# EAGLE board Main-DESKTOP-GF130J3 (EAGLE 9.4.2)
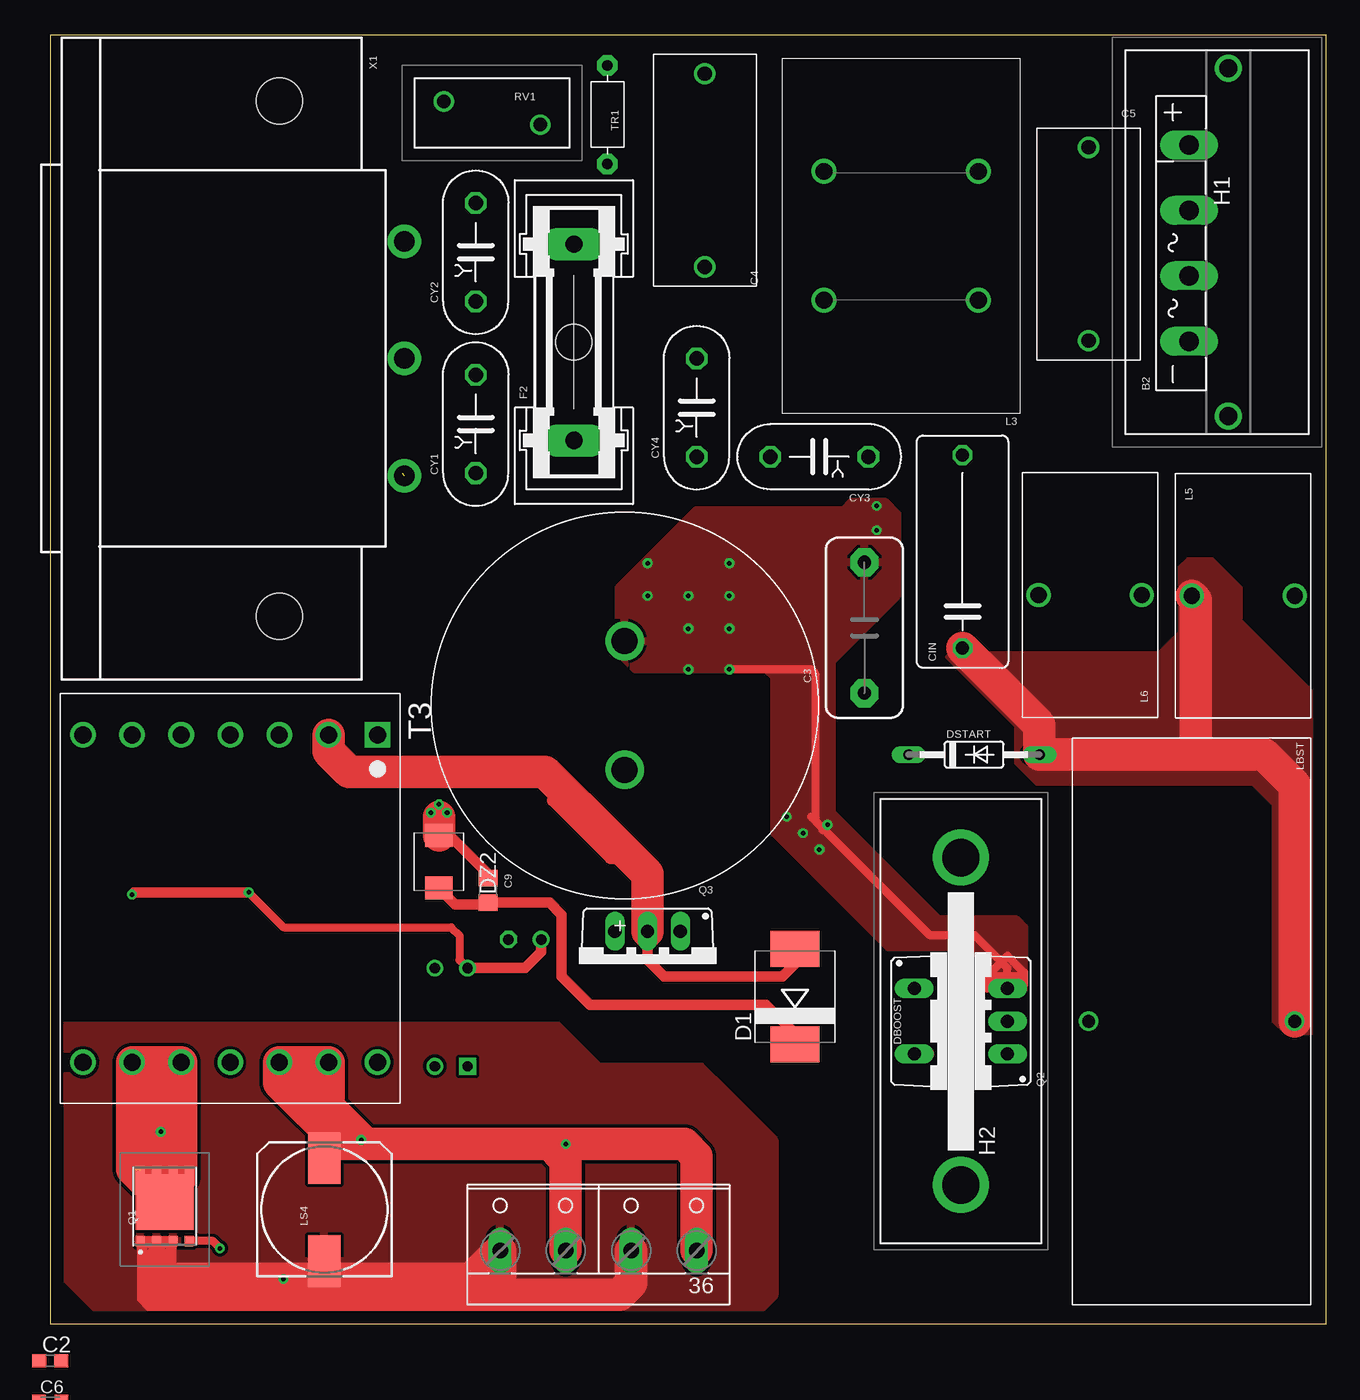
[diagram p0: board, top side]
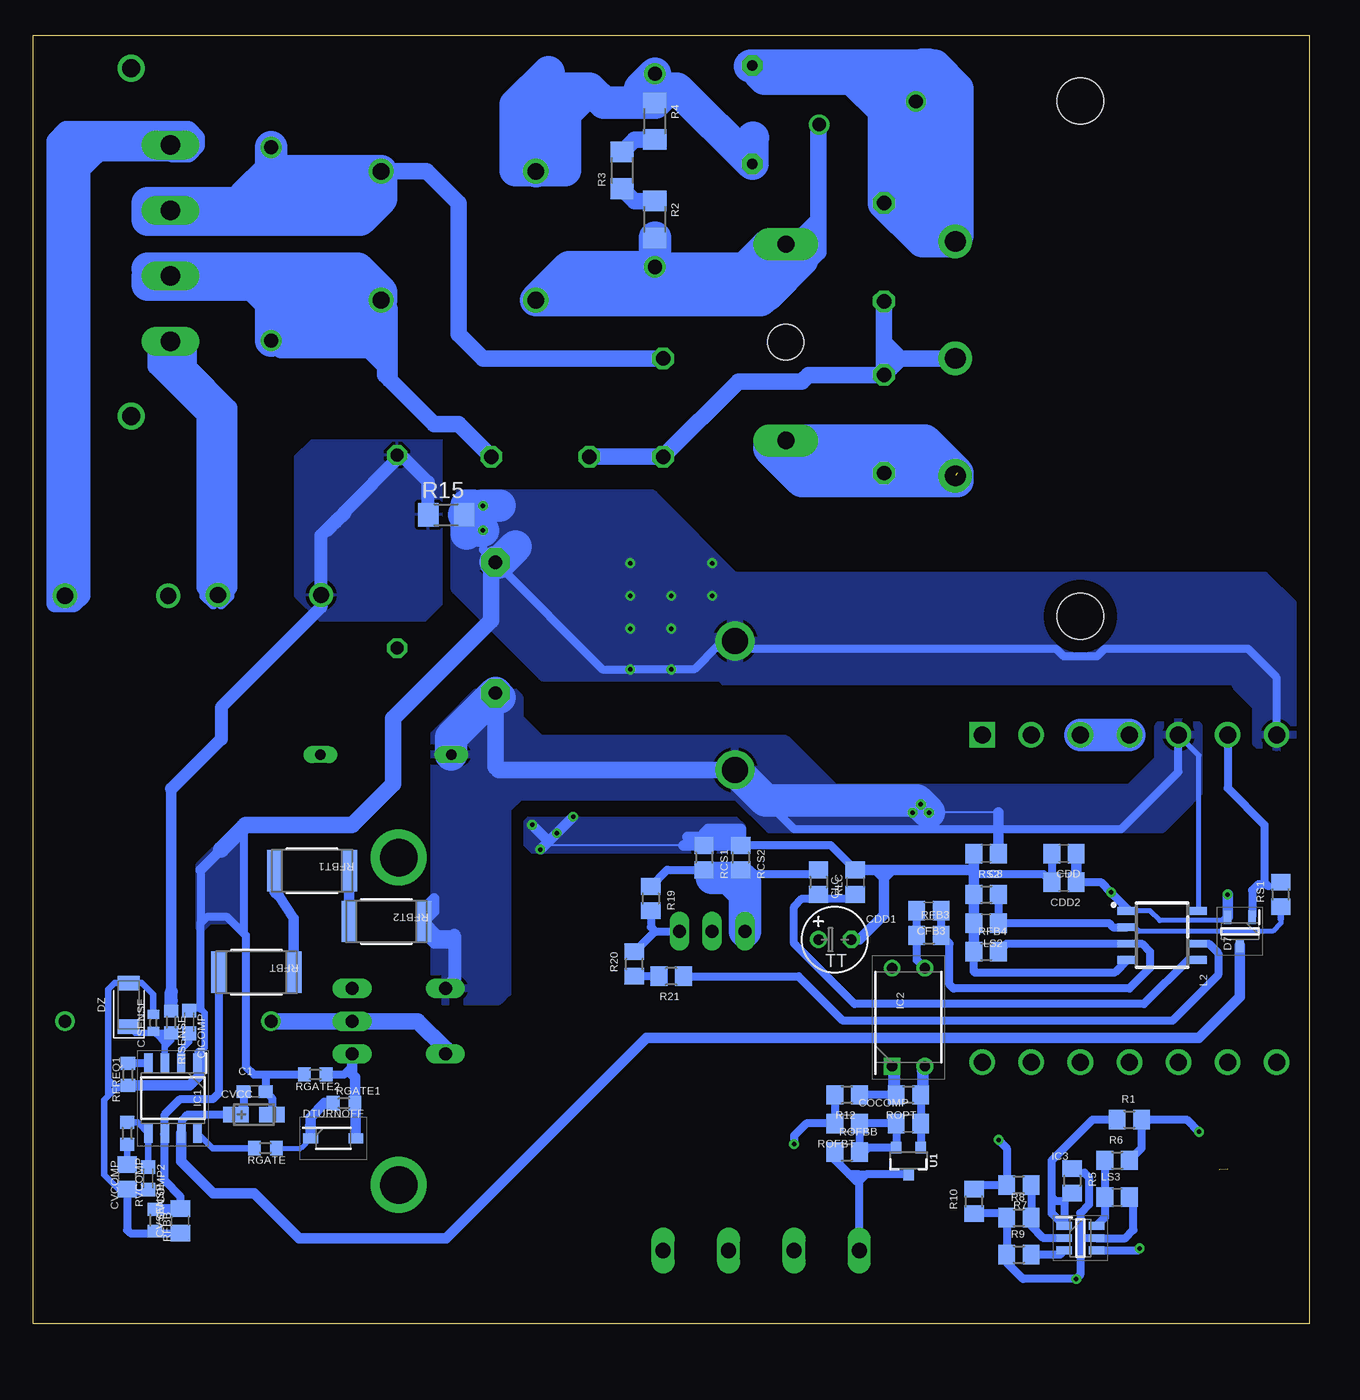
[diagram p1: board, bottom side, seen from below]

Size 99.04 x 100 mm. Coordinates in mm from the lower left corner, seen from the top.
Outline: 0,0 99.04,0 99.04,100 0,100 0,0
Copper layers (1*16): Top 0.035mm / dielectric 1.5mm / Bottom 0.035mm
Design rules "default *": minimum track width 6mil, minimum drill 0.35mm, track to track 10mil, track to pad 10mil, pad to pad 10mil, via to via 10mil, smd to smd 10mil, copper to edge 40mil, drill to drill 6mil, minimum pad ring 10mil, minimum via ring 8mil, stop-mask expansion 4mil, vias tented up to drill 0mil, thermal gap 10mil

## Footprints (pad centres in the part's own frame; a part is rotated, then mirrored left to right if it is on the bottom)
W237-4P = drill 1.194 long: 1 -7.62,-0.635; 2 -2.54,-0.635; 3 2.54,-0.635; 4 7.62,-0.635
GBU4S = drill 1.499 long: + 7.62,0; - -7.62,0; AC1 2.54,0; AC2 -2.54,0
C0603 = smd 1.1 x 1: 1 -0.85,0; 2 0.85,0
30X10X2(DXPXΦ) = drill 2: 1 5,0; 2 -5,0
WCAP-FTXX_15X18X14X8 = drill 1.1: 1 -7.5,0; 2 7.5,0
C0603K = smd 1.05 x 1.08: 1 -0.875,0; 2 0.875,0
C0805 = smd 1.3 x 1.5: 1 -0.95,0; 2 0.95,0
TT2D5 = drill 0.813: + -1.27,0 | drill 0.813 octagon: - 1.27,0
C150-072X183 = drill 1.016 octagon: 1 -7.493,0; 2 7.493,0
C0402 = smd 0.7 x 0.9: 1 -0.65,0; 2 0.65,0
C10,0-14,0X6,0 = drill 1.016 pad 2.184 octagon: 1 -5.08,0; 2 5.08,0
CT3216 = smd 2 x 1.2: + -1.4,0; - 1.4,0
YC7B5 = drill 1.118 octagon: 1 -3.81,0; 2 3.81,0
SMC = smd 2.8 x 3.8: A 3.7,0; C -3.7,0
SOT95P230X110-3N = smd 1.05 x 0.6: 1 -1.1,0.95; 2 -1.1,-0.95; 3 1.1,0
TO220ACS = drill 1.016 long: A 2.54,-2.54; C -2.54,-2.54
DO35-10 = drill 0.813 long: A 5.08,0; C -5.08,0
SOD3716X135N = smd 1.15 x 0.8: 1 -1.75,0; 2 1.75,0
DIOMELF3515 = smd 1.133 x 1.729: 1 -1.691,0; 2 1.691,0
SMBJ = smd 1.78 x 2.16: A 2.04,0; C -2.03,0
GSH15 = drill 1.321 pad 2.54 long: 1 -7.62,0; 2 7.62,0 | hole 2.794: 0,0
CSM22230AE = drill 1.4 pad 2.1: 1 -13.5,-0.885; 2 13.5,-0.885
HSEB20250040H01 = drill 2.9 pad 4.35: 1 -12.7,0; 2 12.7,0
SOIC127P600X175-8N = smd 1.525 x 0.65: 1 -2.712,1.905; 2 -2.712,0.635; 3 -2.712,-0.635; 4 -2.712,-1.905; 5 2.712,-1.905; 6 2.712,-0.635; 7 2.712,0.635; 8 2.712,1.905
DIP762W60P254L460H420Q4N = drill 0.8 pad 1.2 square: 1 -3.81,1.27 | drill 0.8 pad 1.2: 2 -3.81,-1.27; 3 3.81,-1.27; 4 3.81,1.27
SOT95P280X145-6N = smd 1.2 x 0.6: 1 -1.25,0.95; 2 -1.25,0; 3 -1.25,-0.95; 4 1.25,-0.95; 5 1.25,0; 6 1.25,0.95
D(R-PDSO-G7) = smd 0.6 x 1.55: 1 -1.905,-2.7; 2 -0.635,-2.7; 3 0.635,-2.7; 4 1.905,-2.7; 5 1.905,2.7; 6 0.635,2.7; 7 -1.905,2.7
WE-CMB_L = drill 1.3: 2 6,5; 4 6,-5; 7 -6,-5; 9 -6,5
WE-FI_7447016 = drill 1.25: 1 -4,0; 2 4,0
WE-SI_744139 = drill 1: 1 -8,0; 2 8,0
153CLV-1010 = smd 4 x 2.5: + 4,0; - -4,0
CSD19531Q5AT = smd 0.8 x 0.7: 1 2.451,-1.905; 2 2.451,-0.635; 3 2.451,0.635; 4 2.451,1.905 | smd 0.68 x 0.7: 5 -3.064,1.905; 6 -3.064,0.635; 7 -3.064,-0.635; 8 -3.064,-1.905 | smd 4.32 x 4.51: 9 -0.564,0
TO220BV = drill 1.016 long: D 0,-2.54; G -2.54,-2.54; S 2.54,-2.54
R0805 = smd 1.3 x 1.5: 1 -0.95,0; 2 0.95,0
R1206 = smd 1.6 x 1.803: 1 -1.422,0; 2 1.422,0
R0603 = smd 1 x 1.1: 1 -0.85,0; 2 0.85,0
R3216 = smd 1.6 x 1.8: 1 -1.4,0; 2 1.4,0
RC2512N = smd 1.2 x 3.2: 1 -2.9,0; 2 2.9,0
B72210S2271K101 = drill 1.05 pad 1.575: 1 -3.75,0.9; 2 3.75,-0.9
EE25/13/7_THT_H_14PIN_(5644) = drill 1.321 square: 1 -12.7,11.43 | drill 1.321: 2 -12.7,7.62; 3 -12.7,3.81; 4 -12.7,0; 5 -12.7,-3.81; 6 -12.7,-7.62; 7 -12.7,-11.43; 8 12.7,-11.43; 9 12.7,-7.62; 10 12.7,-3.81; 11 12.7,0; 12 12.7,3.81; 13 12.7,7.62; 14 12.7,11.43
R-7,5 = drill 0.813 pad 1.6 octagon: 1 -3.81,0; 2 3.81,0
SOT23-3 = smd 0.8 x 0.9: 1 -0.95,-1; 2 0.95,-1; 3 0,1.1
6ESRM-P = drill 1.6 pad 2.6: 1 -9.1,9.7; 2 0,9.7; 3 9.1,9.7 | hole 3.6: -20,0; 20,0

## Placement (x,y rotation side)
36  +36  [W237-4P]  42.54,6.35 0 top
B2  [GBU4S]  88.39,83.88 90 top
C1  100nF  [C0603]  81.85,18.03 0 bottom
C2  [C0603]  0,-2.86 0 top
C3  [30X10X2(DXPXΦ)]  44.58,48.01 270 top
C4  [WCAP-FTXX_15X18X14X8]  50.8,89.53 90 top
C5  [WCAP-FTXX_15X18X14X8]  80.58,83.82 270 top
C6  [C0603K]  0,-6.03 0 top  (outside the outline)
C8  [C0805]  25.08,36.51 180 bottom
C9  [C0805]  33.97,33.66 270 top
CDD  [C0805]  19.05,36.51 180 bottom
CDD1  [TT2D5]  36.83,29.84 0 bottom
CDD2  [C0805]  19.05,34.29 180 bottom
CFB3  [C0805]  29.53,32.07 180 bottom
CICOMP  1.5nF  [C0603K]  86.93,23.43 270 bottom
CIN  890283325008CS  [C150-072X183]  70.8,59.94 90 top
CISENSE  1nF  [C0402]  89.73,23.37 90 bottom
CLC  [C0805]  35.24,34.29 90 bottom
COCOMP  [C0805]  31.11,15.56 180 bottom
COUTX  100nF  [C10,0-14,0X6,0]  63.18,54.04 90 top
CVCC  293D105X9025A2TE3  [CT3216]  81.92,16.26 0 bottom
CVCOMP  22uF  [C0805]  91.76,11.43 270 bottom
CVCOMP2  22nF  [C0603K]  90.11,11.3 90 bottom
CVSENSE  820nF  [C0805]  87.63,8 90 bottom
CY1  DE2B3KY101KN3AU02F  [YC7B5]  33.02,69.85 90 top
CY2  DE2B3KY101KN3AU02F  [YC7B5]  33.02,83.19 90 top
CY3  DE2B3KY221KN3AU02F  [YC7B5]  59.69,67.31 180 top
CY4  DE2B3KY221KN3AU02F  [YC7B5]  50.16,71.12 90 top
D1  STTH310S  [SMC]  57.78,25.4 90 top
D7  BAV23S  [SOT95P230X110-3N]  5.4,30.48 270 bottom
DBOOST  LXA06T600  [TO220ACS]  69.6,23.5 270 top
DSTART  1N4446  [DO35-10]  71.69,44.2 0 top
DTURNOFF  MBR0540T1G  [SOD3716X135N]  75.76,14.41 0 bottom
DZ  TZMC1V0-M-18  [DIOMELF3515]  91.63,24.77 90 bottom
DZ2  SMBJ130A-13-F  [SMBJ]  30.16,35.88 90 top
F2  [GSH15]  40.64,76.2 90 top
H1  CSM222-30AE  [CSM22230AE]  90.55,83.95 90 top
H2  HSE-B20250-040H-01  [HSEB20250040H01]  70.68,23.5 270 top
IC1  UCC28180D  [SOIC127P600X175-8N]  88.2,17.53 270 bottom
IC2  LTV-817-B  [DIP762W60P254L460H420Q4N]  31.11,23.81 90 bottom
IC3  UCC24636DBVR  [SOT95P280X145-6N]  17.78,6.67 0 bottom
L2  UCC28740DR  [D(R-PDSO-G7)]  11.43,30.16 270 bottom
L3  [WE-CMB_L]  66.04,84.45 180 top
L5  [WE-FI_7447016]  92.58,56.52 0 top
L6  [WE-FI_7447016]  80.71,56.58 180 top
LBST  494.23uH  [WE-SI_744139]  88.58,23.5 180 top
LS2  [C0805]  25.08,31.11 180 bottom
LS3  [C0805]  14.92,9.84 0 bottom
LS4  [153CLV-1010]  21.27,8.89 90 top
Q1  CSD19531Q5AT  [CSD19531Q5AT]  8.89,8.89 270 top
Q2  IPA60R330P6XKSA1  [TO220BV]  71.76,23.5 90 top
Q3  IPA65R190CFD  [TO220BV]  46.35,27.94 180 top
R1  [R0805]  13.97,15.88 0 bottom
R2  750k  [R1206]  50.8,85.72 270 bottom
R3  301k  [R1206]  53.34,89.53 90 bottom
R4  750k  [R1206]  50.8,93.34 270 bottom
R5  [R0805]  18.41,11.11 270 bottom
R6  [R0805]  14.92,12.7 0 bottom
R7  [R0805]  22.54,10.79 180 bottom
R8  [R0805]  22.54,8.26 0 bottom
R9  [R0805]  22.54,5.4 0 bottom
R10  [R0805]  26.04,9.53 90 bottom
R11  [R0603]  0,-9.53 0 top  (outside the outline)
R12  [R0805]  35.88,17.78 180 bottom
R15  WSK1206R0300FEA18  [R3216]  66.99,62.8 0 bottom
R19  [R0805]  51.12,33.02 270 bottom
R20  [R0805]  52.39,27.94 90 bottom
R21  [R0805]  49.53,26.99 180 bottom
RCS1  [R0805]  46.99,36.2 270 bottom
RCS2  [R0805]  44.13,36.2 270 bottom
RFB3  [R0805]  29.53,30.16 0 bottom
RFB4  [R0805]  25.08,28.89 0 bottom
RFBB  13K  [R0603]  89.6,8.06 270 bottom
RFBT  CRCW2512300KJNEG  [RC2512N]  81.72,27.3 180 bottom
RFBT1  CRCW2512300KJNEG  [RC2512N]  77.41,35.18 180 bottom
RFBT2  CRCW2512402KFKEG  [RC2512N]  71.63,31.24 180 bottom
RFREQ1  17.4K  [R0603]  91.69,19.37 270 bottom
RGATE  3.92  [R0603]  81.03,13.65 180 bottom
RGATE1  1.07  [R0603]  74.93,17.14 0 bottom
RGATE2  10K  [R0603]  77.15,19.37 180 bottom
RISENSE  221  [R0603]  88.33,23.43 270 bottom
RLC  [R0805]  38.1,34.29 270 bottom
ROFBB  [R0805]  35.88,13.34 0 bottom
ROFBT  [R0805]  35.88,15.56 180 bottom
ROPT  [R0805]  31.11,17.78 180 bottom
RS1  [R0805]  2.22,33.34 90 bottom
RS2  [R0805]  25.08,33.34 0 bottom
RV1  B72210S2271K101  [B72210S2271K101]  34.29,93.98 0 top
RVCOMP  287K  [R0603]  91.76,14.8 270 bottom
T3  750815330  [EE25/13/7_THT_H_14PIN_(5644)]  13.97,33.02 270 top
TR1  B57237S229M  [R-7,5]  43.24,93.85 90 top
U1  TL431SOT23  [SOT23-3]  31.11,12.7 180 bottom
X1  6ESRM-P  [6ESRM-P]  17.78,74.93 270 top

## Library data of the parts
36 = con-wago-508; OC_FARNELL: unknown; OC_NEWARK: unknown
B2 = rectifier
C1 C2 C6 C8 C9 CDD CDD1 CDD2 CFB3 CICOMP CIN CISENSE CLC COCOMP CVCC CVCOMP CVCOMP2 CVSENSE CY1-CY4 LS2-LS4 = rcl; SPICEPREFIX: C
C3 = Wurth_Elektronik_Passive_Capacitors_rev18b; WE-NUMBER: 861011485018/330uF
C4 C5 = Wurth_Elektronik_Passive_Capacitors_rev18b; WE-NUMBER: 890334025039CS/0,47uF
COUTX = cap-pan40
D1 DBOOST DSTART DZ2 = diode
D7 = SamacSys_Parts; DESCRIPTION: BAV23S, Rectifier Diode, Switching 0.225A max, 250V Dual, 3-Pin, TO-236AB; HEIGHT: 1.1mm; MANUFACTURER_NAME: Nexperia; MANUFACTURER_PART_NUMBER: BAV23S; MOUSER_PART_NUMBER: N/A; MOUSER_PRICE-STOCK: https://www.mouser.com/Search/Refine.aspx?Keyword=N%2FA
DTURNOFF = SamacSys_Parts; ALLIED_NUMBER: 70099497; ALLIED_PRICE-STOCK: http://www.alliedelec.com/on-semiconductor-mbr0540t1g/70099497/; DESCRIPTION: 0.5A 40V Schottky Rectifier, MBR0540T1G ON Semiconductor MBR0540T1G Schottky Diode, 0.5A, 40V, 2-Pin SOD-123; HEIGHT: 1.35mm; MANUFACTURER_NAME: ON Semiconductor; MANUFACTURER_PART_NUMBER: MBR0540T1G; MOUSER_PART_NUMBER: 863-MBR0540T1G; MOUSER_PRICE-STOCK: https://www.mouser.com/Search/Refine.aspx?Keyword=863-MBR0540T1G; RS_PART_NUMBER: 0463842P; RS_PRICE-STOCK: http://uk.rs-online.com/web/p/products/0463842P
DZ = TZMC1V0-M-18
F2 = fuse; MPN: 64900001039; OC_FARNELL: 1271673; OC_NEWARK: 02P0318
H1 = SamacSys_Parts; ALLIED_NUMBER: 70952223; ALLIED_PRICE-STOCK: https://www.alliedelec.com/ohmite-csm222-30ae/70952223/; DESCRIPTION: OHMITE - CSM222-30AE - HEAT SINK, ALUMINIUM ALLOY, 30MM, TO-220; HEIGHT: 31mm; MANUFACTURER_NAME: Ohmite; MANUFACTURER_PART_NUMBER: CSM222-30AE; MOUSER_PART_NUMBER: 588-CSM222-30AE; MOUSER_PRICE-STOCK: https://www.mouser.com/Search/Refine.aspx?Keyword=588-CSM222-30AE
H2 = SamacSys_Parts; DESCRIPTION: Heat Sinks 25x29x12.5mm w/pin extrusion TO-220; HEIGHT: 25mm; MANUFACTURER_NAME: CUI; MANUFACTURER_PART_NUMBER: HSE-B20250-040H-01; MOUSER_PART_NUMBER: 490-HSE-B20250040H01; MOUSER_PRICE-STOCK: https://www.mouser.com/Search/Refine.aspx?Keyword=490-HSE-B20250040H01
IC1 = SamacSys_Parts; DESCRIPTION: TEXAS INSTRUMENTS - UCC28180D - IC, BOOST PFC CONT, GATE DRIVE, SOIC-8; HEIGHT: 1.75mm; MANUFACTURER_NAME: Texas Instruments; MANUFACTURER_PART_NUMBER: UCC28180D; MOUSER_PART_NUMBER: 595-UCC28180D; MOUSER_PRICE-STOCK: https://www.mouser.com/Search/Refine.aspx?Keyword=595-UCC28180D
IC2 = SamacSys_Parts; DESCRIPTION: Lite-On LTV-817-B DC Input Transistor Output Optocoupler, Through Hole, 4-Pin PDIP; HEIGHT: 4.2mm; MANUFACTURER_NAME: Lite-On; MANUFACTURER_PART_NUMBER: LTV-817-B; MOUSER_PART_NUMBER: N/A; MOUSER_PRICE-STOCK: https://www.mouser.com/Search/Refine.aspx?Keyword=N%2FA; RS_PART_NUMBER: 6912145P; RS_PRICE-STOCK: http://uk.rs-online.com/web/p/products/6912145P
IC3 = SamacSys_Parts; DESCRIPTION: Synchronous Rectifier Controller With Ultra-Low Standby Current; HEIGHT: 1.45mm; MANUFACTURER_NAME: Texas Instruments; MANUFACTURER_PART_NUMBER: UCC24636DBVR; MOUSER_PART_NUMBER: 595-UCC24636DBVR; MOUSER_PRICE-STOCK: https://www.mouser.com/Search/Refine.aspx?Keyword=595-UCC24636DBVR
L2 = SamacSys_Parts; DESCRIPTION: Constant-Voltage, Constant-Current Flyback Controller Using Opto-Coupler Feedback; HEIGHT: mm; MANUFACTURER_NAME: Texas Instruments; MANUFACTURER_PART_NUMBER: UCC28740DR; MOUSER_PART_NUMBER: 595-UCC28740DR; MOUSER_PRICE-STOCK: https://www.mouser.com/Search/Refine.aspx?Keyword=595-UCC28740DR
L3 = Wurth_Elektronik_Passive_rev18f; WE-NUMBER: 744824310/10mH
L5 L6 = Wurth_Elektronik_Passive_rev18f
LBST = Wurth_Elektronik_Passive_rev18f; WE-NUMBER: 744139/1124uH
Q1 = SamacSys_Parts; DESCRIPTION: Texas Instruments CSD19531Q5AT N-channel MOSFET Transistor, 110 A, 100 V, 8-Pin VSON; HEIGHT: 1mm; MANUFACTURER_NAME: Texas Instruments; MANUFACTURER_PART_NUMBER: CSD19531Q5AT; MOUSER_PART_NUMBER: 595-CSD19531Q5AT; MOUSER_PRICE-STOCK: https://www.mouser.com/Search/Refine.aspx?Keyword=595-CSD19531Q5AT; RS_PART_NUMBER: 8239259P; RS_PRICE-STOCK: http://uk.rs-online.com/web/p/products/8239259P
Q2 Q3 = transistor-power
R1-R12 R15 R19-R21 RCS1 RCS2 RFB3 RFB4 RFBB RFREQ1 RGATE RGATE1 RGATE2 RISENSE RLC ROFBB ROFBT ROPT RS1 RS2 RVCOMP = rcl; SPICEPREFIX: R
RFBT RFBT1 = CRCW2512300KJNEG; MANUFACTURER_PART_NUMBER: CRCW2512300KJNEG; VENDOR: Vishay
RFBT2 = CRCW2512402KFKEG; MANUFACTURER_PART_NUMBER: CRCW2512402KFKEG; VENDOR: Vishay
RV1 = SamacSys_Parts; DESCRIPTION: EPCOS - B72210S2271K101 - VARISTOR, MOV, 710V, DISC 10MM; HEIGHT: 15mm; MANUFACTURER_NAME: EPCOS; MANUFACTURER_PART_NUMBER: B72210S2271K101; MOUSER_PART_NUMBER: 871-B72210S2271K101; MOUSER_PRICE-STOCK: https://www.mouser.com/Search/Refine.aspx?Keyword=871-B72210S2271K101
T3 = wurth_electronics_midcom_inc_v2-1
TR1 = discrete
U1 = SparkFun-DiscreteSemi
X1 = con-tycoelectronics; MF: TYCO ELECTRONICS; MPN: 6ESRM-P; OC_FARNELL: unknown; OC_NEWARK: 87F1821

## Nets
EMIOUT1: B2.AC2 C5.2 CY3.1 L3.9
EMIOUT2: B2.AC1 C5.1 CY4.2 L3.7
GATE: IC1.8 RGATE.2
N$1: B2.- L6.1
N$2: CIN.2 L6.2 R15.1 RISENSE.1
N$3: DBOOST.A LBST.2 Q2.D
N$4: B2.+ L5.2
N$5: COCOMP.2 ROFBB.2 ROFBT.1 U1.2
N$6: CFB3.2 IC2.3 RFB3.1
N$7: CIN.1 DSTART.A L5.1 LBST.1
N$8: T3.3 T3.4
N$10: DTURNOFF.2 Q2.G RGATE1.2 RGATE2.1
N$11: DTURNOFF.1 RGATE1.1 RGATE.1
N$12: D7.1 RS1.2 T3.6
N$15: IC2.1 R12.1 ROPT.2
N$16: CVCOMP.1 RVCOMP.2
N$17: CFB3.1 L2.3 RFB3.2 RFB4.2
N$18: COCOMP.1 IC2.2 ROPT.1 U1.1
N$19: 36.2 36.4 LS4.+ R7.2 R10.2 R12.2 ROFBT.2 T3.12 T3.13
N$20: R2.1 R3.1
N$22: IC3.4 Q1.4
N$25: R3.2 R4.2
N$27: L2.2 LS2.1 RS1.1 RS2.2
N$28: RFBT1.1 RFBT2.2
N$29: CY1.1 F2.1 X1.3
N$30: Q1.5 Q1.6 Q1.7 Q1.8 Q1.9 R1.2 R6.2 T3.9 T3.10
N$31: RFBT1.2 RFBT.1
N$38: CY2.2 RV1.1 TR1.2 X1.1
N$40: C4.2 L3.4 R4.1 TR1.1
N$43: R20.1 R21.2
N$44: Q3.G R19.2 R20.2
N$45: CY1.2 CY2.1 CY3.2 CY4.1 X1.2
N$50: C9.2 D1.C DZ2.C
N$52: D1.A Q3.D T3.2
N$CS: CLC.1 L2.5 RLC.2
N$DRV: L2.6 R21.1
N$FREQ: IC1.4 RFREQ1.1
N$ICOMP: CICOMP.2 IC1.2
N$ISENSE: CISENSE.1 DZ.1 IC1.3 RISENSE.2
N$TBK: IC3.3 R9.2
N$VCOMP: CVCOMP2.2 IC1.5 RVCOMP.1
N$VODD: IC3.6 LS3.1 R6.1
N$VPC: IC3.1 R1.1 R5.2
N$VSC: IC3.2 R7.1 R8.2
N$VSENSE: CVSENSE.2 IC1.6 RFBB.1 RFBT.2
PGND: C1.2 C3.2 C8.2 CDD1.- CDD2.2 CDD.2 CICOMP.1 CISENSE.2 CLC.2 COUTX.2 CVCC.- CVCOMP2.1 CVCOMP.2 CVSENSE.1 DZ.2 IC1.1 L2.4 LS2.2 Q2.S R15.2 RCS1.1 RCS2.1 RFB4.1 RFBB.2 RFREQ1.2 RGATE2.2 RS2.1 T3.7
PH2: C4.1 F2.2 L3.2 R2.2 RV1.2
TOISENSE: Q3.S R19.1 RCS1.2 RCS2.2 RLC.1
VBULK: C3.1 C8.1 C9.1 COUTX.1 DBOOST.C DSTART.C DZ2.A L2.7 RFBT2.1 T3.5
VCCCIC: C1.1 CVCC.+ D7.3 IC1.7
VDD: CDD1.+ CDD2.1 CDD.1 D7.2 IC2.4 L2.1
VOGND: 36.1 36.3 IC3.5 LS3.2 LS4.- Q1.1 Q1.2 Q1.3 R5.1 R8.1 R9.1 R10.1 ROFBB.1 U1.3

## Tracks (layer width: path | path; a pad name or v marks a point on that pad's centre or on a via)
EMIOUT1
  Bottom 0.61: 70.48,72.39 71.41,73.31
  Bottom 1.27: CY3.1 66.04,69.85 67.95,69.85 71.76,73.66 71.76,74.3 | L3.9 71.41,78.82 71.41,73.31 | 73.03,75.56 79.83,75.56 C5.2 73.54,76.32 73.03,76.83 73.03,77.47 79.38,77.47 | 73.03,75.56 72.39,75.56 72.39,78.11 79.76,78.11 80.58,78.92 | 72.04,80.09 71.76,79.81 71.76,74.3 | 71.76,74.3 73.03,75.56
  Bottom 2.54: C5.2 80.58,78.92 | 80.58,78.92 80.58,79.31 82.55,81.28 | 80.58,78.92 80.05,79.45 L3.9 72.04,80.09 73.87,81.92 87.82,81.92 | B2.AC2 87.69,80.64 | 87.69,80.64 78.11,80.64 78.11,81.28 | 88.96,81.92 89.54,81.92 | 89.54,81.92 90.17,81.28 90.17,80.64 87.69,80.64 | B2.AC2 88.96,81.92 | 89.54,81.92 90.17,81.92 | B2.AC2 87.82,81.92 | 87.82,81.92 88.96,81.92
EMIOUT2
  Bottom 1.27: L3.7 68.5,89.45 66.04,87 66.04,76.83 64.14,74.93 CY4.2
  Bottom 2.54: L3.7 80.05,89.45 80.58,89.99 C5.1 80.58,89.6 82.55,87.63 | L3.7 72.04,88.58 73.62,87 88.9,87 | 74.3,86.36 88.33,86.36 B2.AC1 89.6,86.42 | L3.7 72.04,87.34 73.66,85.72 88.9,85.72 | 88.9,85.72 89.54,86.36 88.9,87 | 88.9,85.72 90.17,85.72 90.17,87 | 89.6,86.42 90.17,87 | 89.6,86.42 89.03,87 | 89.03,87 88.9,87 | 89.03,87 90.17,87
GATE
  Bottom 0.508: IC1.8 85.14,13.65 RGATE.2
N$1
  Bottom 0.813: 85.73,57.15 85.73,56.52 85.09,55.88 84.71,56.26 L6.1 84.71,56.13 84.45,55.88 83.82,56.52 83.82,57.15
  Bottom 1.27: 85.09,71.12 84.71,70.74 L6.1 | 88.33,76.2 B2.- 88.39,74.42 85.09,71.12 | 88.33,76.2 87,76.2 87,74.3 | 87,74.3 83.82,71.12 83.82,57.15 85.73,57.15 85.73,70.48 | 85.73,70.48 85.09,71.12 | 88.33,76.2 89.54,76.2 89.54,74.3 85.73,70.48 | 88.33,76.2 88.33,75.63 87,74.3
N$2
  Bottom 0.61: 88.33,25.78 88.33,41.53
  Bottom 0.813: 88.27,41.59 88.33,41.66 88.33,41.53 88.33,25.08
  Bottom 1.016: 74.93,62.99 74.8,62.99 75.56,62.23 | 75.56,62.36 76.71,61.21 L6.2 76.71,55.63 84.45,47.88 84.45,45.4 88.33,41.53 | 74.93,62.99 75.56,62.36 | 75.56,62.36 75.56,62.23 | 75.56,62.23 76.2,61.59 | 74.93,62.99 70.48,67.44 CIN.2 70.49,67.44 68.39,65.34 R15.1 | RISENSE.1 88.33,25.08 88.33,25.78
  pour Bottom: 67.31,68.58 77.47,68.58 78.74,67.31 78.74,56.52 76.84,54.61 68.58,54.61 67.31,55.88
N$3
  Top 1.016: 66.67,20.95 DBOOST.A
  Top 1.27: DBOOST.A 67.95,20.95
  Bottom 1.27: Q2.D LBST.2 69.22,23.5 67.06,21.34 DBOOST.A
N$4
  Bottom 0.508: 95.25,91.5 95.7,91.5 96.58,90.61 L5.2
  Bottom 1.27: L5.2 95.25,57.85 | 93.98,91.5 95.25,90.23 95.25,89.53 | 95.25,89.53 95.25,57.85 | 95.25,91.5 B2.+ | B2.+ 93.28,91.5 95.25,89.53 | B2.+ 89.6,92.71 | 89.6,92.71 90.17,92.71 | 90.17,92.71 96.52,92.71 97.39,91.84 97.39,55.88 | 96.52,55.88 97.22,55.88 | L5.2 95.88,56.52 95.25,57.15 96.12,57.15 97.39,55.88 | L5.2 95.95,55.88 | 95.95,55.88 95.89,55.88 95.25,56.52 | L5.2 97.22,55.88 | 97.22,55.88 97.39,55.88 | L5.2 96.58,55.94 96.52,55.88 | 95.25,57.85 95.25,56.52 | 95.25,56.52 95.31,56.52 95.95,55.88 | 95.95,55.88 96.52,55.88 | 88.27,91.44 88.9,92.08 88.9,92.71 | 87,92.08 87.63,92.71 | 87.63,92.71 88.9,92.71 | 88.9,92.71 89.6,92.71 | 90.17,92.71 88.27,90.81 87,90.81 86.36,91.44 86.36,92.08 87,92.71 87.63,92.71
  Bottom 2.54: B2.+ 93.98,91.5 95.25,91.5 96.58,90.17 L5.2
N$5
  Bottom 0.61: COCOMP.2 U1.2 34.24,13.7 34.61,13.34 ROFBB.2 ROFBT.1 COCOMP.2
N$6
  Bottom 0.61: IC2.3 30.48,28.25 RFB3.1 CFB3.2
N$7
  Top 2.54: LBST.1 96.58,41.85 94.23,44.2 88.9,44.2 | 88.9,44.2 DSTART.A 76.77,46.48 CIN.1 | L5.1 88.9,56.2 88.9,44.2
  pour Top: 95.89,22.54 98.11,22.54 98.74,23.18 98.74,48.26 92.39,54.61 92.39,57.15 90.17,59.37 88.27,59.37 87.63,58.74 87.63,53.66 86.04,52.07 71.76,52.07 71.12,52.7 70.8,52.39 70.17,52.39 69.53,51.75 74.93,46.35 74.93,43.5 76.52,41.91 93.34,41.91 94.93,40.32 94.93,23.5
N$8
  Bottom 2.54: T3.3 T3.4
N$10
  Bottom 0.406: RGATE2.1 76.23,19.44
  Bottom 0.508: RGATE1.2 74.02,17.2 73.94,17.21 73.95,17.21
  Bottom 0.61: RGATE2.1 74.93,19.37 74.3,20 Q2.G
  Bottom 0.813: RGATE1.2 74.08,19.15 74.3,19.37 Q2.G | DTURNOFF.2 74.01,17.18 74.02,17.2
N$11
  Bottom 0.406: RGATE.1 78.27,13.65 DTURNOFF.1
  Bottom 0.813: 77.51,15.42 77.56,15.37 | DTURNOFF.1 77.51,15.42 | 77.51,15.42 77.51,16.05 76.42,17.14 RGATE1.1
N$12
  Bottom 0.406: 4.45,33.65 4.13,33.97 | 3.18,33.97 2.54,33.97 RS1.2
  Bottom 0.61: T3.6 6.35,41.59 3.49,38.73 3.49,34.29 3.33,34.13 | 3.33,34.13 3.18,33.97 | 3.33,34.13 3.97,34.13 4.45,33.65 D7.1
  Bottom 1.016: T3.6
N$15
  Bottom 0.61: ROPT.2 32.06,19.68 IC2.1 32.38,18.1 ROPT.2 | ROPT.2 R12.1
N$16
  Bottom 0.508: RVCOMP.2 CVCOMP.1
N$17
  Bottom 0.61: RFB4.2 23.5,29.53 L2.3 13.02,29.53 12.38,28.89 12.38,27.62 13.97,26.04 27.62,26.04 27.94,26.35 27.94,29.52 RFB3.2 CFB3.1
N$18
  Bottom 0.61: ROPT.1 29.85,17.78 IC2.2 30.16,19.68 ROPT.1 | ROPT.1 COCOMP.1 U1.1
N$19  (via drill 0.35)
  Top 0.61: LS4.+ 21.59,13.21 21.59,16.83
  Top 2.54: T3.12 T3.13 21.59,16.83 v24.13,14.29 | T3.12 17.78,18.73 22.54,13.97 38.73,13.97 | 36.2 40,12.7 38.73,13.97 | 38.73,13.97 v40,13.97 49.21,13.97 50.16,13.02 36.4 | T3.12 18.41,20.32 20.64,18.1
  Bottom 0.61: v24.13,14.29 23.5,13.65 R7.2 25.71,10.79 R10.2 | R12.2 ROFBT.2 39.05,15.56 40,14.61 v40,13.97
N$20
  Bottom 1.27: R3.1 52.37,87.15 R2.1
N$22  (via drill 0.35)
  Top 0.61: v13.18,5.87 12.61,6.44 Q1.4
  Bottom 0.61: IC3.4 13.33,5.72 v13.18,5.87
N$25
  Bottom 1.27: R3.2 52.37,91.92 R4.2
N$27
  Bottom 0.406: RS1.1 2.22,31.12 2.86,30.48 13.18,30.48 13.5,30.8 L2.2
  Bottom 0.508: RS1.1 2.22,31.43
  Bottom 0.61: RS2.2 LS2.1 15.56,31.11 15.24,30.8 L2.2
N$28
  Bottom 0.813: RFBT2.2 74.53,35.16 RFBT1.1
N$29  (1 unrouted)
  Bottom 2.54: 39.16,65.83 41.91,68.58 | CY1.1 32.81,65.83 X1.3 | 41.91,68.58 41.91,67.94 39.37,65.41 27.3,65.41 27.3,66.04 29.84,68.58 F2.1 | 41.91,68.58 40,68.58 38.1,66.67 30.48,66.67
N$30  (via drill 0.35)  (1 unrouted)
  Top 0.61: v8.57,14.92 8.57,8.89 8.89,9.21 Q1.9
  Top 0.813: Q1.8 Q1.7 Q1.6 Q1.5
  Top 2.54: 8.89,10.16 10.16,11.43 T3.10 8.57,20.32 | 8.57,20.32 T3.9 6.35,11.99 Q1.9 8.57,9.77 v8.57,14.92 8.57,20.32
  Bottom 0.61: R1.2 12.38,15.88 | 12.38,15.88 9.53,15.88 v8.57,14.92 | R6.2 13.02,13.65 13.02,15.24 12.38,15.88
N$31
  Bottom 0.813: RFBT.1 78.83,31.46 80.01,33.25 80.31,33.55 RFBT1.2
N$38
  Bottom 2.54: CY2.2 31.11,88.9 31.11,95.89 33.02,93.98 CY2.2 | CY2.2 30.05,84.03 X1.1 | X1.1 27.48,91.82 RV1.1 29.91,95.51 29.91,97.16 27.3,94.55 | CY2.2 31.75,88.27 30.48,88.27 30.48,87 | 31.11,90.81 29.21,92.71 29.21,90.87 29.21,86.36 29.21,85.76 28.6,85.15 | TR1.2 29.08,97.66 27.3,95.89 27.3,94.55 | CY2.2 30.48,84.45 27.3,84.45 27.3,94.55 | 43.24,97.6 43.43,97.6 43.37,97.66 TR1.2 | 43.24,97.6 35.5,97.6 33.34,95.44 33.08,95.69 33.08,96.08 31.81,96.08 30.54,94.81 | 43.24,97.6 42.29,96.65 35.5,96.65 32.96,94.11 32.96,90.11 | TR1.2 30.1,97.66 30.05,97.71 29.53,97.71 | CY2.2 32.77,86.74 31.56,86.74 | X1.1 28.6,85.15 | 29.59,85.28 29.46,85.15 28.6,85.15
N$40
  Bottom 2.54: 43.18,92.08 43.24,92.01 TR1.1 49.08,95.89 49.68,95.89 R4.1 | L3.4 60.12,89.53 | 60.12,89.53 61.59,89.53 61.59,90.81 | 61.59,90.81 57.78,90.81 | 57.78,90.81 57.78,89.53 60.12,89.53 | 61.59,90.81 61.59,94.61 59.05,97.16 | 58.42,95.89 59.05,95.89 60.32,94.61 60.32,92.71 59.69,92.08 57.78,92.08 | 58.42,95.89 55.88,95.89 | 57.78,92.08 57.78,93.98 55.88,95.89 | 57.78,92.08 57.78,90.81 | 58.42,95.89 59.69,94.61 59.69,93.34 | 51.95,95.89 C4.2 R4.1 | R4.1 54.76,94.77 55.88,95.89
N$43
  Bottom 0.61: R21.2 R20.1
N$44
  Bottom 0.61: R20.2 50.8,30.48 | 50.8,30.48 Q3.G | R19.2 51.12,30.8 50.8,30.48
N$45
  Bottom 0.61: 43.94,73.15 43.47,73.15 43.8,73.48 39.51,73.48 39.34,73.66
  Bottom 1.27: CY3.2 CY4.1 44.32,73.15 43.94,73.15 39.38,73.15 38.87,73.66 CY1.2 | 33.02,74.93 CY2.1 33.02,76.2 31.75,74.93 | 31.75,74.93 33.02,74.93 | 33.02,74.93 CY1.2 | CY1.2 31.75,74.93 | 31.75,74.93 X1.2
N$50
  Top 0.813: DZ2.C 31.43,32.58 33.84,32.58 C9.2 38.73,32.7 39.69,31.75 39.69,26.99 41.91,24.77 55.56,24.77 57.78,22.54 D1.C
N$52  (via drill 0.35)
  Top 0.813: Q3.D 46.35,28.26 47.62,26.99 56.83,26.99 57.78,27.94 D1.A
  Top 1.016: 23.81,43.5 37.46,43.5 39.05,41.91 39.05,40.64 43.5,36.2 45.72,36.2 46.35,35.56 46.35,34.92
  Top 2.54: T3.2 21.59,44.45 23.18,42.86 38.42,42.86 43.5,37.78 46.35,34.92 Q3.D
  other vias: 21.59,45.72
N$CS
  Bottom 0.61: RLC.2 37.78,33.02 | 37.78,33.02 39.37,33.02 40,32.38 40,29.53 35.3,24.83 12.84,24.83 9.41,28.26 L2.5 | 37.78,33.02 35.56,33.02 CLC.1
N$DRV
  Bottom 0.61: R21.1 39.66,26.99 36.2,23.53 10.64,23.53 7.08,27.09 7.08,28.79 7.82,29.53 L2.6
N$FREQ
  Bottom 0.61: IC1.4 91.67,20.24 RFREQ1.1
N$ICOMP
  Bottom 0.508: IC1.2 87.57,21.27 86.93,21.91 CICOMP.2
N$ISENSE
  Bottom 0.508: RISENSE.2 88.33,22.01 88.84,21.5 | 88.84,21.5 IC1.3 | DZ.1 91.14,22.58 RISENSE.2 | CISENSE.1 89.13,22.12 | 89.13,22.12 88.84,21.83 88.84,21.5 | RISENSE.2 88.79,22.12 89.13,22.12
N$TBK
  Bottom 0.61: R9.2 19.35,5.4 IC3.3
N$VCOMP
  Bottom 0.508: RVCOMP.1 90.94,15.65 IC1.5 CVCOMP2.2
N$VODD
  Bottom 0.61: IC3.6 15.87,8.28 LS3.1 R6.1
N$VPC
  Bottom 0.61: 20,9.53 20,8.59 IC3.1 19.03,9.55 R5.2 19.05,9.53 19.68,9.53 | 20,9.53 20,9.84 | 20,9.84 20,12.7 16.83,15.88 R1.1 | 19.68,9.53 20,9.53 | 20,9.84 19.68,9.53
N$VSC
  Bottom 0.61: IC3.2 20.64,6.67 21.59,7.62 R8.2 R7.1
N$VSENSE
  Bottom 0.61: CVSENSE.2 87.63,9.9 88.9,11.17 88.9,14.75 IC1.6 88.84,16.26 87.63,17.46 85.09,17.46 84.62,17.93 RFBT.2
  Bottom 0.813: RFBB.1 87.67,8.91 CVSENSE.2
PGND  (via drill 0.35)
  Top 0.61: Q2.S 74.3,27.62 71.76,30.16 68.26,30.16 60.01,38.42 59.37,39.05 | 59.37,39.05 59.37,50.48 59.05,50.8 v52.7,50.8 | 59.37,39.05 59.05,39.37 | Q2.S 73.66,26.04 72.71,26.99 74.3,28.57 75.56,27.3 75.56,26.35 75.25,26.04 Q2.S | Q2.S 72.71,26.04 72.39,26.35 72.39,26.67 75.25,26.67 75.25,26.99 73.03,26.99 73.98,26.04 Q2.S
  Top 0.813: v60.32,38.73 60.01,38.42
  Bottom 0.152: RFB4.1 25.88,28.73 | 48.58,37.15 59.38,37.15
  Bottom 0.254: v64.14,61.59 v64.14,63.5
  Bottom 0.406: C1.2 80.83,17.86 | 19.68,36.2 CDD.2
  Bottom 0.508: CVCOMP.2 91.5,10.23 90.17,10.23 90.11,10.29 CVCOMP2.1 | 91.66,10.58 CVCOMP.2 | CISENSE.2 89.73,25.59 90.62,26.48 91.63,26.48 DZ.2 92.73,26.46 93.22,25.97 93.22,18.99 | IC1.1 86.36,20.17 | 92.58,18.35 93.22,17.71 | CVCOMP.2 92.47,10.48 93.55,11.56 93.55,17.38 93.22,17.71 | 92.46,18.35 92.58,18.35 93.22,18.99 | 93.22,18.99 93.22,17.71 | 86.13,21.04 85.73,21.45 85.73,24.16 86.06,24.49 86.75,24.49 CICOMP.1
  Bottom 0.61: 92.46,18.35 91.86,18.35 RFREQ1.2 91.53,18.35 | DZ.2 92.27,26.46 | 92.58,18.35 | CVCOMP.2 91.76,7.3 91.51,7.05 89.6,7.05 | 86.06,35.23 86.06,31.11 | 86.06,24.49 86.06,31.11 | IC1.1 86.13,20.41 | 89.6,7.05 CVSENSE.1 | RFBB.2 89.6,7.05 | 82.71,38.58 82.71,30.32 | 82.71,30.32 82.55,30.16 82.55,20 81.92,19.37 80.96,19.37 | 82.71,30.32 83.98,31.59 85.58,31.59 86.06,31.11 | 80.96,19.37 RGATE2.2 | CVCC.- 80.52,17.55 C1.2 80.96,18.07 80.96,19.37 | C3.2 45.2,52.39 19.65,52.39 19.07,51.81 16.49,51.81 15.91,52.39 4.76,52.39 2.54,50.16 T3.7 | v64.14,61.59 64.14,60.07 COUTX.2 54.86,50.8 v52.7,50.8 47.73,50.8 45.93,52.6 45.72,52.39 | CLC.2 37.15,37.15 RCS2.1 | L2.4 15.08,27.3 26.03,27.3 RFB4.1 26.03,29.21 | C8.2 26.03,35.24 26.03,34.92 | 26.03,34.92 RS2.1 | 26.03,34.92 20.64,34.92 CDD2.2 CDD.2
  Bottom 0.813: 86.13,21.04 86.13,20.41 86.13,19.28 86.89,18.52 RFREQ1.2 | 86.06,35.23 84.45,36.83 | 59.38,37.15 v59.69,36.83 58.9,37.62 | 58.9,37.62 v57.15,39.37 | v60.32,38.73 59.21,37.62 58.9,37.62 | CLC.2 33.65,35.24 | 26.03,35.24 26.04,35.24 32.39,35.24 | CDD1.- 34.92,29.84 33.02,31.75 33.02,34.61 | 33.65,35.24 33.02,34.61 | 33.65,35.24 32.39,35.24 | 33.02,34.61 32.39,35.24 | C8.2 RS2.1 LS2.2 26.03,29.21 | RCS1.1 RCS2.1 44.13,37.78 | RCS1.1 48.58,37.15 | 44.13,37.78 44.13,38.42 46.67,38.42 46.99,38.1 RCS1.1 | 44.13,37.78 48.26,37.78
  Bottom 1.27: COUTX.2 63.5,58.8 63.5,54.61 71.12,46.99 71.12,41.91 74.3,38.73 82.55,38.73 82.71,38.58 84.45,36.83
  Bottom 2.54: 63.12,59.05 COUTX.2 62.8,59.12 61.59,60.33 | 65.41,61.34 65.41,63.5 64.89,63.5 R15.2 | R15.2 65.53,62.87 | R15.2 64.39,61.59 v64.14,61.59 | v64.14,63.5 62.87,63.5
  other vias: 46.35,59.05 46.35,56.52 52.7,59.05 49.53,56.52 52.7,56.52 49.53,53.98 49.53,50.8 52.7,53.98 58.42,38.1
  pour Bottom: 66.04,64.14 51.12,64.14 44.45,57.47 44.45,51.44 45.4,50.48 59.37,50.48 66.04,57.15
  pour Bottom: 82.87,38.73 86.04,35.56 86.04,30.8 85.41,31.43 83.19,31.43 82.87,31.75
  pour Bottom: 2.54,44.77 3.81,44.77 4.13,45.09 4.13,47.94 5.71,49.53 5.71,49.85 45.4,49.85 46.04,50.48 46.04,57.47 45.72,57.78 45.4,58.1 40.96,58.1 3.49,58.1 1.27,55.88 1.27,45.4 1.9,44.77 2.22,44.77
  pour Top: 44.13,52.07 44.13,57.15 50.16,63.18 61.59,63.18 62.23,63.82 64.77,63.82 65.72,62.87 65.72,56.52 60.64,51.44 60.64,39.69 68.9,31.43 74.93,31.43 75.56,30.8 75.56,26.04 75.25,25.72 73.34,25.72 72.39,26.67 72.39,28.26 71.44,29.21 65.09,29.21 56.2,38.1 56.2,50.16 55.56,50.8 45.4,50.8
  pour Bottom: 44.13,36.51 59.05,36.51 60.32,36.51 60.64,36.83 60.96,37.15 60.96,38.73 60.96,39.05 60.64,39.37 44.45,39.37 43.81,38.73 43.81,36.83
PH2
  Bottom 1.27: RV1.2 38.1,93.02 38.1,85.72 | 38.1,85.72 38.1,83.19 39.37,81.92 40.64,83.19 F2.2 40,83.82 38.1,85.72
  Bottom 2.54: C4.1 57.46,82.03 L3.2 44.45,79.45 | 44.45,79.45 42.59,79.45 42.17,79.88 42.04,79.88 39.37,82.55 39.37,83.82 F2.2 41.91,83.82 43.81,81.92 48.89,81.92 | 48.89,81.92 50.68,81.92 C4.1 | 44.45,79.45 40.72,83.19 40.64,83.19 | R2.2 C4.1 | 48.89,81.92 50.16,80.64 57.78,80.64
TOISENSE
  Bottom 0.61: R19.1 49.85,35.24 49.84,35.24 RCS2.2 | 46.35,34.61 44.45,32.7 | RLC.1 38.41,34.92 43.81,34.92
  Bottom 0.813: 43.81,34.92 RCS2.2 44.13,34.61 | RCS1.2 46.35,34.61
  Bottom 2.54: Q3.S 43.81,34.29 44.13,34.61 46.35,34.61
VBULK  (via drill 0.35 pad 0.55)
  Top 0.152: v29.53,39.69 29.84,39.69 30.16,39.37 | v30.16,40.32 v30.8,39.69 30.16,39.05 | v30.16,40.32 v29.53,39.69 | v29.53,39.69 30.16,39.05 | 30.16,39.05 DZ2.A v30.16,40.32
  Top 0.813: C9.1 33.97,34.92 30.16,38.73 v30.16,40.32
  Top 2.54: 30.16,39.37 DZ2.A
  Bottom 0.152: C3.1 41.26,39.69 v30.8,39.69 | v30.8,39.69 30.48,40.01 30.48,40.64 | v30.16,40.32 v29.53,39.69 | v29.53,39.69 v30.8,39.69 | 24.13,39.69 v29.53,39.69
  Bottom 0.406: L2.7 8.57,32.23 8.57,44.13 T3.5
  Bottom 0.61: C3.1 39.99,38.42 14.61,38.42 10.16,42.86 T3.5
  Bottom 0.813: RFBT2.1 67.95,32.02 67.95,33.02 68.73,32.24 RFBT2.1 | RFBT2.1 67.65,30.16 66.36,30.16 | 66.36,29.53 67.95,29.53 68.26,29.84 | 24.13,39.69 24.13,38.73 C8.1
  Bottom 1.016: 66.36,30.16 66.36,29.53 66.36,26.73 DBOOST.C
  Bottom 1.27: COUTX.1 63.18,43.24 62.95,43.01 C3.1
  Bottom 2.54: DSTART.C 66.61,45.53 COUTX.1 62.87,48.64 | C3.1 42.21,40.64 30.48,40.64 v29.53,39.69
  pour Bottom: 8.57,45.72 8.57,46.35 8.89,46.67 11.43,46.67 11.75,46.35 11.75,44.45 11.75,43.81 13.97,41.59 36.83,41.59 40.64,45.4 59.69,45.4 61.28,46.99 61.28,48.58 62.55,49.85 63.5,49.85 63.82,49.85 67.63,46.04 67.95,45.72 67.95,41.59 67.95,25.72 67.31,25.08 62.87,25.08 62.23,25.72 62.23,40.01 61.28,40.96 44.45,40.96 41.91,38.42 41.27,38.42 11.43,38.42 9.21,40.64 8.57,41.27
VCCCIC
  Bottom 0.61: IC1.7 87.5,14.88 87.5,15.81 87.05,16.26 CVCC.+ 82.7,16.87 C1.1
  Bottom 0.813: IC1.7 87.57,12.64 85.09,10.16 81.92,10.16 78.42,6.67 66.99,6.67 51.43,22.23 8.57,22.23 5.4,25.4 D7.3
VDD  (via drill 0.35)
  Top 0.61: v15.4,33.5 18.1,30.8 31.11,30.8 31.75,30.16 31.75,28.26 IC2.4
  Top 0.813: v6.35,33.34 6.51,33.5 v15.4,33.5 | IC2.4 36.83,27.62 38.1,28.89 CDD1.+
  Bottom 0.406: D7.2 6.54,31.58 6.81,31.31 11.62,31.31 12.38,32.07 L2.1
  Bottom 0.61: 17.78,33.97 CDD2.1 16.19,34.29 v15.4,33.5 14.13,32.23 L2.1
  Bottom 0.813: D7.2 v6.35,33.34 | CDD.1 CDD2.1
VOGND  (via drill 0.35)
  Top 0.406: Q1.1 7.21,6.67 9.3,6.67 Q1.3 | Q1.3 9.53,6.03 8.26,6.03 | 8.26,6.03 6.99,6.03 Q1.1 | Q1.2 8.26,6.03 | Q1.1 Q1.2 | Q1.2 9.21,6.44 Q1.3
  Top 0.508: 9.21,6.44 9.21,5.08 7.3,5.08 7.3,6.12 Q1.1 6.99,2.54 | 8.26,4.76 Q1.2 | Q1.3 9.53,3.81 10.16,3.17 | 6.99,2.54 8.26,1.27 | 6.99,2.54 6.99,1.91 7.62,1.27 8.89,1.27
  Top 0.61: LS4.- 21.27,2.6 20.96,2.29
  Top 2.54: 34.92,2.29 36.1 32.7,3.49 v18.1,3.49 9.46,3.49 8.26,2.29 | 34.92,2.29 20.96,2.29 8.26,2.29 | 8.26,2.29 8.26,4.76 | 36.3 45.08,3.17 44.2,2.29 34.92,2.29
  Bottom 0.61: 17.78,6.37 17.48,6.67 IC3.5 14.29,6.67 13.65,7.3 13.65,9.52 LS3.2 | R5.1 18.1,11.74 18.1,11.75 17.46,11.75 17.11,11.39 17.11,9.28 17.78,8.61 17.78,6.37 | 17.78,6.37 17.78,3.81 v18.1,3.49 22.23,3.49 23.49,4.76 R9.1 R8.1 23.81,8.57 R10.1 | 34.92,11.6 35.7,11.6 | 34.92,11.6 34.44,11.6 | U1.3 34.44,11.6 | 36.1 34.92,11.11 | 34.92,11.11 34.92,11.6 | ROFBB.1 36.83,12.73 35.7,11.6 | 35.7,11.6 35.21,11.11 34.92,11.11 | 34.92,11.11 34.44,11.6
  pour Top: 0.64,23.18 39.37,23.18 42.54,20 50.48,20 52.39,18.1 56.2,14.29 56.2,2.22 54.61,0.64 53.97,0.64 4.13,0.64 1.59,3.17 0.95,3.81 0.64,3.81
(copper drawn outside any net)
  shapes: Top area x2